# Altium PCB LedLampDriver_S.PcbDoc
Units mm, origin at the board's own origin, x right, y up, seen from the top; angles counter-clockwise.
Board outline 24 x 21.5 mm, 2 copper layers (Top Layer, Bottom Layer); 23 components, 11 nets, 63 pads, 229 vias.
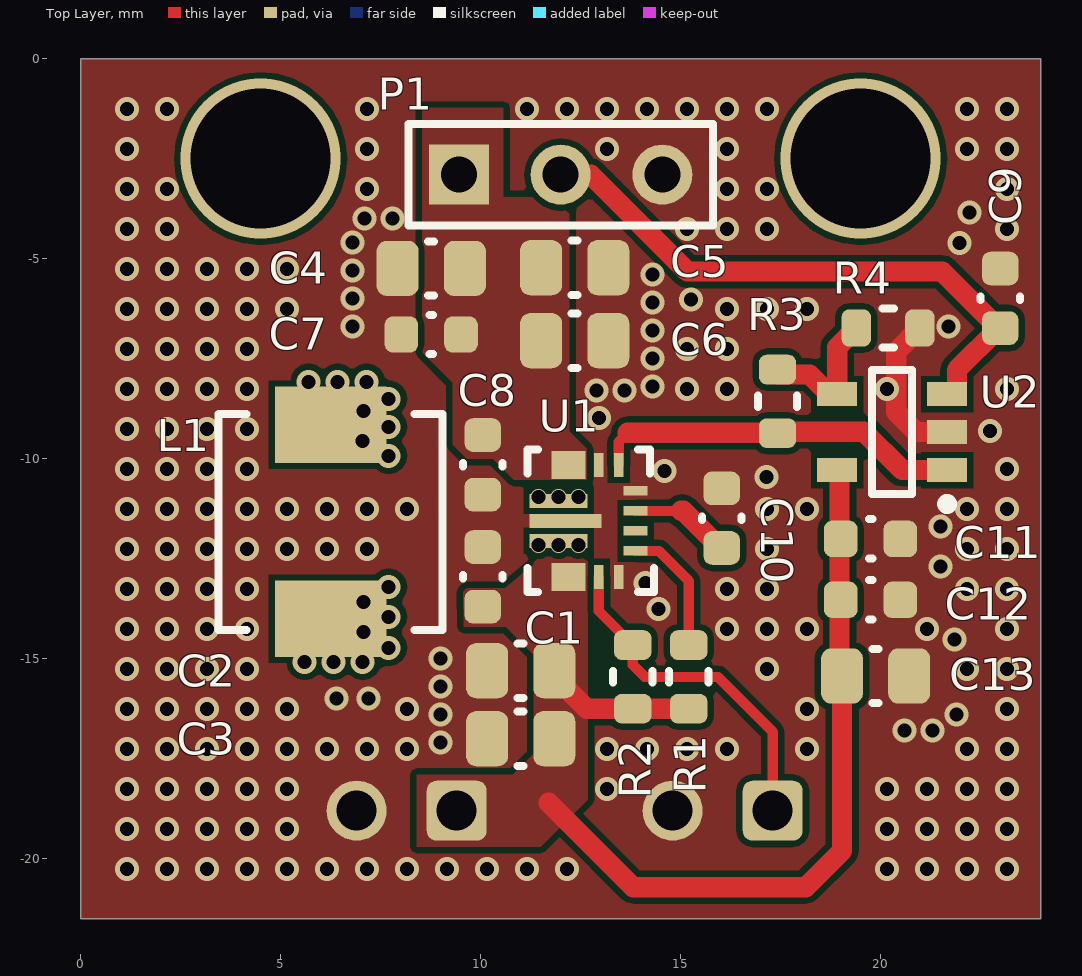
[diagram p0: Top Layer view]
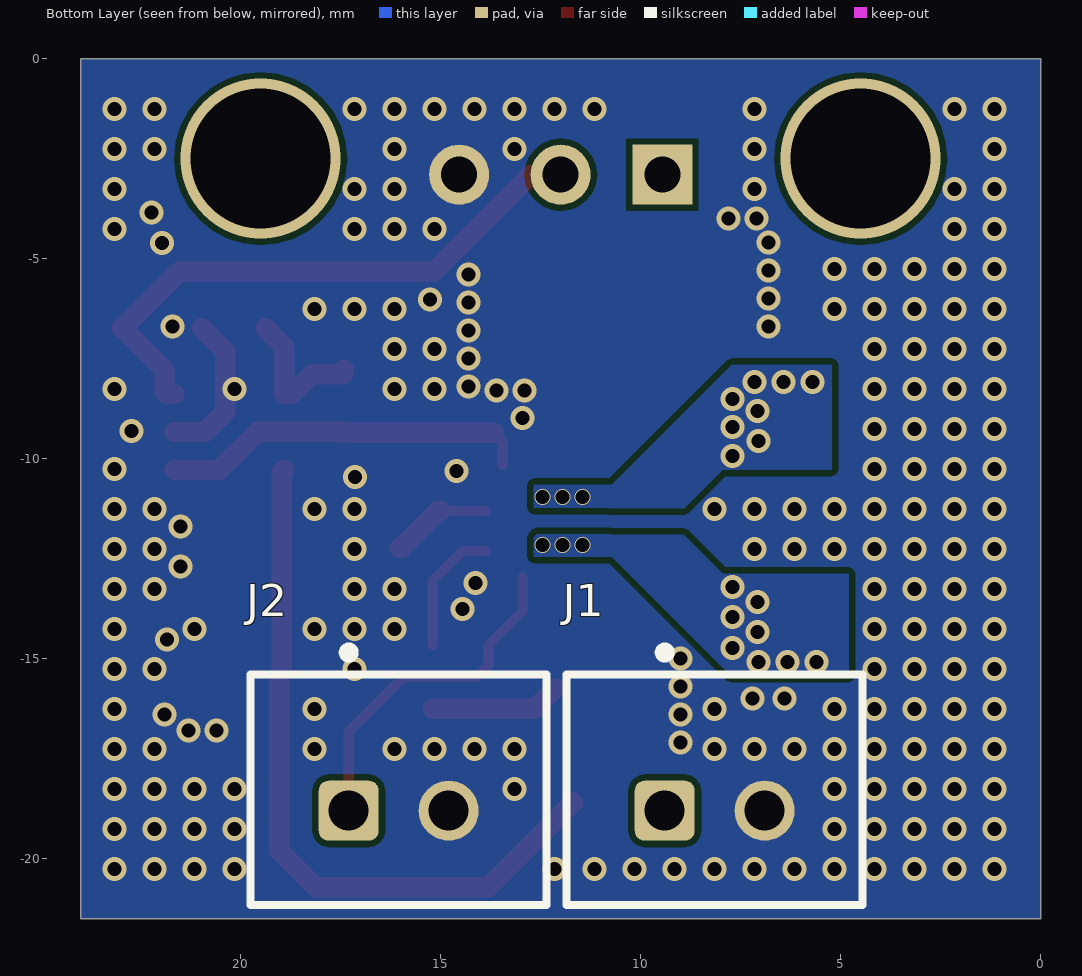
[diagram p1: Bottom Layer view, seen from below]
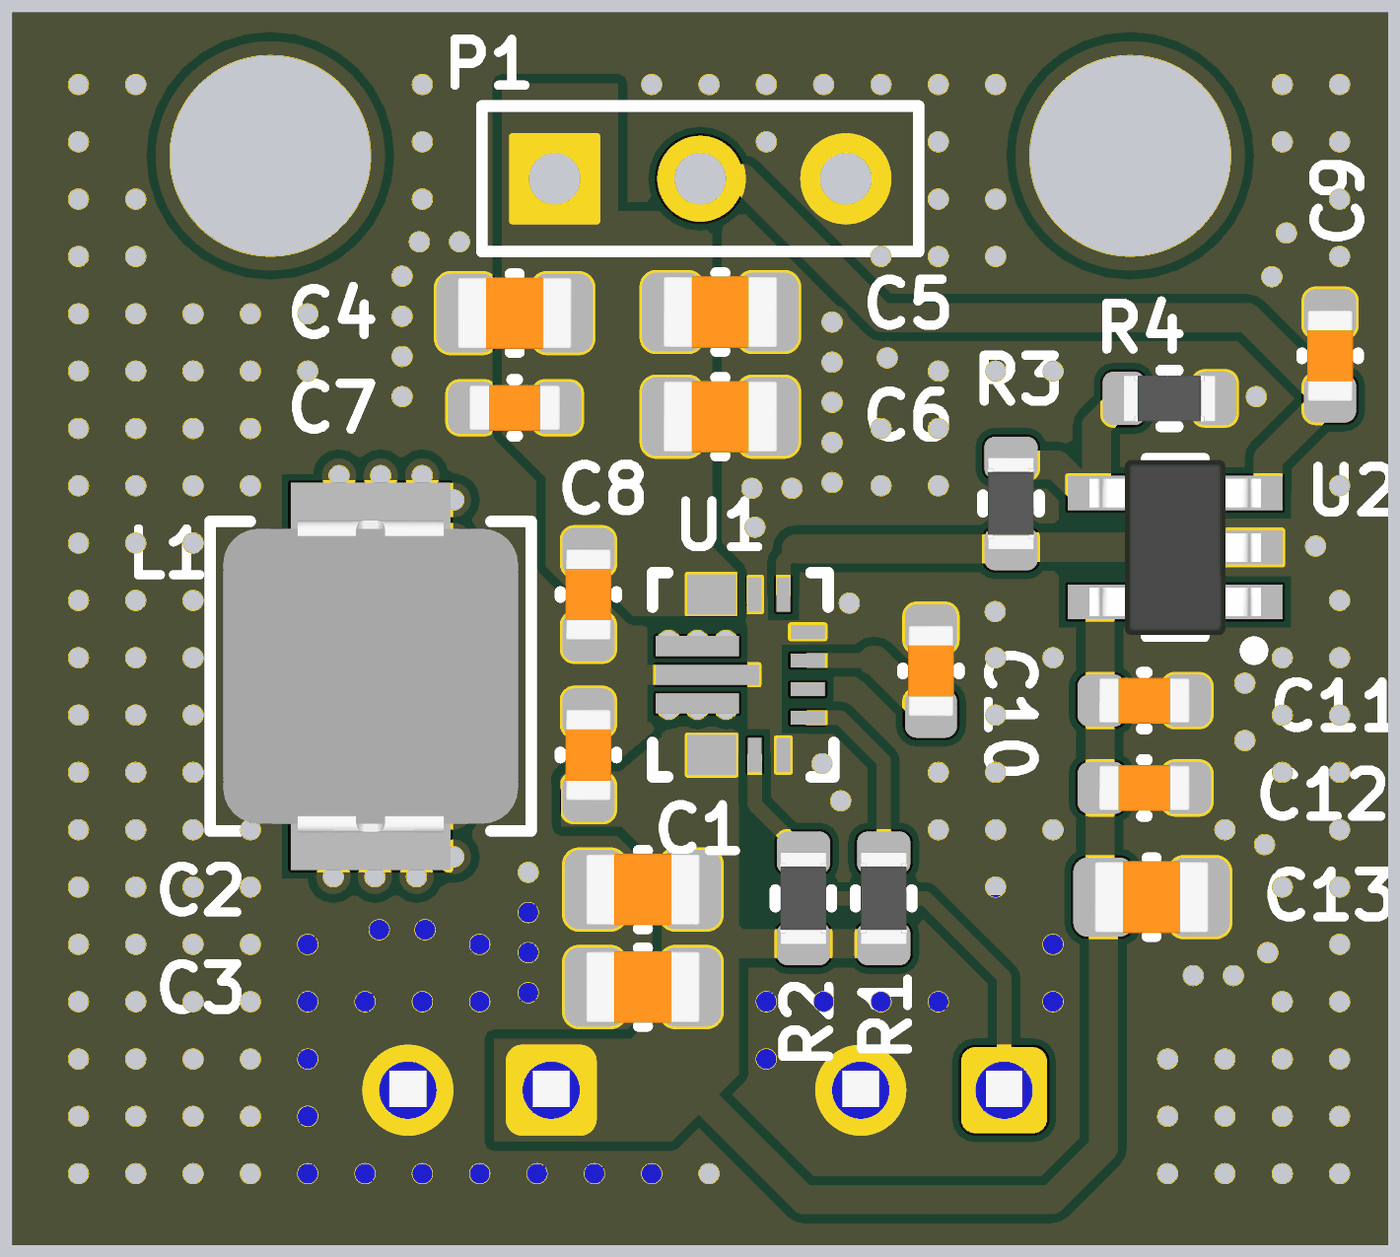
[diagram p2: 3D render of the assembled board from above, using the file's embedded part models]

## Layer stack, top to bottom
Top Solder: solder mask 0.0102, Solder Resist, Dk 3.5
Top Layer: signal copper 0.0356
Dielectric 1: dielectric 0.32, FR-4, Dk 4.8
Bottom Layer: signal copper 0.0356
Bottom Solder: solder mask 0.0102, Solder Resist, Dk 3.5

## Board outline
0,-21.5 0,0 24,0 24,-21.5

## Design rules (kind name [scope] priority, off if disabled: settings)
Clearance "Keepout 0" [All vs IsKeepOut] p1: gap=0.01 ignorepadtopadclearanceinfootprint=FALSE
Clearance [All] p2: gap=0.15 ignorepadtopadclearanceinfootprint=FALSE except(0: Arc-Hole Track-Hole SMDPad-Hole THPad-Hole Via-Hole Fill-Hole Poly-Hole Region-Hole Text-Hole)
HoleSize [All] p1: absolutevalues=TRUE maxlimit=6.3 minlimit=0.2 maxpercent=80.000 minpercent=20.000
MinimumAnnularRing [All] p1: minimumring=0.076
MinimumSolderMaskSliver [All] p1: minsoldermaskwidth=0.08
NetAntennae [All] p1: netantennaetolerance=1
PlaneConnect [All] p1: planeconnectstyle=Direct reliefexpansion=0.508 reliefentries=4 reliefconductorwidth=0.254 reliefairgap=0.254
PolygonConnect [All] p1: connectstyle=Direct reliefconductorwidth=0.254 reliefentries=4 polygonreliefangle="90 Angle" airgapwidth=0.254
RoomDefinition U_Sim_socket [InComponentClass('U_Sim_socket')] p1 off: confinementstyle=ConfineIn formatcopy=TRUE lockcomponents=FALSE outline -94.847,-76.256 -44.047,-76.256 -44.047,-50.856 -94.847,-50.856
RoomDefinition U_PSU3V5 [InComponentClass('U_PSU3V5')] p2 off: confinementstyle=ConfineIn formatcopy=TRUE lockcomponents=FALSE outline -94.847,-76.256 -44.047,-76.256 -44.047,-50.856 -94.847,-50.856
RoomDefinition U_PSU3V3 [InComponentClass('U_PSU3V3')] p3 off: confinementstyle=ConfineIn formatcopy=TRUE lockcomponents=FALSE outline -94.847,-76.256 -44.047,-76.256 -44.047,-50.856 -94.847,-50.856
RoomDefinition U_Power_connectors [InComponentClass('U_Power_connectors')] p4 off: confinementstyle=ConfineIn formatcopy=TRUE lockcomponents=FALSE outline -94.847,-76.256 -44.047,-76.256 -44.047,-50.856 -94.847,-50.856
RoomDefinition U_Motor [InComponentClass('U_Motor')] p5 off: confinementstyle=ConfineIn formatcopy=TRUE lockcomponents=FALSE outline -94.847,-76.256 -44.047,-76.256 -44.047,-50.856 -94.847,-50.856
RoomDefinition U_Limit_switches [InComponentClass('U_Limit_switches')] p6 off: confinementstyle=ConfineIn formatcopy=TRUE lockcomponents=FALSE outline -94.847,-76.256 -44.047,-76.256 -44.047,-50.856 -94.847,-50.856
RoomDefinition U_From_main_conn [InComponentClass('U_From_main_conn')] p7 off: confinementstyle=ConfineIn formatcopy=TRUE lockcomponents=FALSE outline -94.847,-76.256 -44.047,-76.256 -44.047,-50.856 -94.847,-50.856
RoomDefinition U_Flash [InComponentClass('U_Flash')] p8 off: confinementstyle=ConfineIn formatcopy=TRUE lockcomponents=FALSE outline -94.847,-76.256 -44.047,-76.256 -44.047,-50.856 -94.847,-50.856
RoomDefinition U_Ext_I2C [InComponentClass('U_Ext_I2C')] p9 off: confinementstyle=ConfineIn formatcopy=TRUE lockcomponents=FALSE outline -94.847,-76.256 -44.047,-76.256 -44.047,-50.856 -94.847,-50.856
RoomDefinition U_EEPROM [InComponentClass('U_EEPROM')] p10 off: confinementstyle=ConfineIn formatcopy=TRUE lockcomponents=FALSE outline -94.847,-76.256 -44.047,-76.256 -44.047,-50.856 -94.847,-50.856
RoomDefinition U_CPU [InComponentClass('U_CPU')] p11 off: confinementstyle=ConfineIn formatcopy=TRUE lockcomponents=FALSE outline -94.847,-76.256 -44.047,-76.256 -44.047,-50.856 -94.847,-50.856
RoomDefinition U_Buzzer [InComponentClass('U_Buzzer')] p12 off: confinementstyle=ConfineIn formatcopy=TRUE lockcomponents=FALSE outline -94.847,-76.256 -44.047,-76.256 -44.047,-50.856 -94.847,-50.856
RoomDefinition U_Battery_charger [InComponentClass('U_Battery_charger')] p13 off: confinementstyle=ConfineIn formatcopy=TRUE lockcomponents=FALSE outline -94.847,-76.256 -44.047,-76.256 -44.047,-50.856 -94.847,-50.856
RoomDefinition U_Accelerometer [InComponentClass('U_Accelerometer')] p14 off: confinementstyle=ConfineIn formatcopy=TRUE lockcomponents=FALSE outline -94.847,-76.256 -44.047,-76.256 -44.047,-50.856 -94.847,-50.856
RoutingVias [All] p1: holewidth=1 width=1.2 viastyle="Through Hole" minholewidth=0.35 minwidth=0.4 maxholewidth=0.5 maxwidth=0.6
SilkToSilkClearance [All] p1: silktosilkclearance=0.15
SilkToSolderMaskClearance [IsPad] p1: minsilkscreentomaskgap=0.15 clearancetoexposedcopper=TRUE
SolderMaskExpansion [All] p1: expansion=0.045
Width [All] p1: maxlimit=1.27 minlimit=0.254 preferedwidth=0.254 minimp=50.000000 maximp=50.000000 favimp=50.000000
24 further rules are at their usual default settings.

## Components (designator, comment, footprint, x,y, rotation, side; value= is the part's Value field where it differs from the comment)
C1 "10u" C0603_N 10.05,-12.953 r90 top
C2 "10u" C0805_N 11,-15.3 r180 top
C3 "100n" C0805_N 11,-17 r180 top
C4 "22u" C0805_N 8.763,-5.244 r180 top
C5 "22u" C0805_N 12.35,-5.225 r0 top
C6 "22u" C0805_N 12.35,-7.05 r0 top
C7 "1u" C0603_N 8.763,-6.895 r180 top
C8 "100n" C0603_N 10.05,-10.153 r270 top
C9 "100n" C0603_N 22.987,-5.989 r90 top
C10 "100n" C0603_N 16.024,-11.486 r90 top
C11 "100n" C0603_N 19.746,-12.003 r0 top
C12 "100n" C0603_N 19.746,-13.527 r0 top
C13 "1u" C0805_N 19.873,-15.432 r0 top
J1 "=Value" B2B-XH-A 9.4,-18.8 r180 bottom
J2 "=Value" B2B-XH-A 17.3,-18.8 r180 bottom
L1 "1.5u" IHLP2020 6.25,-11.578 r90 top
P1 "Header 3" HDR1X3 9.46,-2.9 r0 top
R1 "10k" R0603_N 15.2,-15.453 r90 top
R2 "10k" R0603_N 13.8,-15.453 r90 top
R3 "RES" R0603_N 17.421,-8.565 r90 top
R4 "RES" R0603_N 20.185,-6.732 r180 top
U1 "=Value" TPS63070 14.232,-13.334 r180 top
U2 "OP_AMP" SOT-23-5 20.285,-9.332 r180 top

## Footprints (in the part's own frame and the unit in brackets; to place one, negate y for a bottom-side part, rotate by r counter-clockwise, add the part's x,y. Pads: shape width x height; smd on the part's side, far side on the other; paste and mask are expansions set on the pad)
B2B-XH-A [mm] "Header, Vertical, 2.50 mm pitch; 0.70 mm lead width, 5 pins, 1 row, 5 pins per row, 14.90 mm L X 5.75 mm W X 7.00 mm H body"
  rrect33% 1.5x1.5 / inner round 1.5 / far side rrect33% 1.5x1.5 hole 1 paste-1.5: 1(0,0)
  round 1.5 hole 1 paste-1.5: 2(2.5,0)
  silkscreen extent -2.45,-2.35 4.95,4.08, body extent -2.45,-2.35 4.95,3.4, height 7.05
C0603_N [mm] "Capacitor, Chip; 1.60 mm L X 0.80 mm W X 0.87 mm H body"
  rrect50% 0.84x0.91 smd: 1(-0.745,0) 2(0.745,0)
  silkscreen extent -0.05,-0.49 0.05,0.49, body extent -0.8,-0.4 0.8,0.4, height 0.87
C0805_N [mm] "Capacitor, Chip; 2.00 mm L X 1.25 mm W X 1.35 mm H body"
  rrect48% 1.05x1.38 smd: 1(-0.84,0) 2(0.84,0)
  silkscreen extent -0.08,-0.68 0.08,0.68, body extent -1,-0.63 1,0.63, height 1.35
HDR1X3 [mm] "Connector; Header; 3 Position"
  rect 1.5x1.5 hole 0.9: 1(0,0)
  round 1.5 hole 0.9: 2(2.54,0) 3(5.08,0)
  silkscreen extent -1.27,-1.27 6.35,1.27
IHLP2020 [mm] "Inductor, 5.18mm L X 5.18mm W X 3 mm H body"
  rect 1.905x2.79 smd: 1(-2.425,0) 2(2.425,0)
  silkscreen extent -2.7,-2.8 2.7,2.8, body extent -2.73,-2.57 2.73,2.57, height 2.84
R0603_N [mm] "Resistor, Chip; 1.60 mm L X 0.80 mm W X 0.55 mm H body"
  rrect51% 0.74x0.93 smd: 1(-0.795,0) 2(0.795,0)
  silkscreen extent -0.15,-0.49 0.15,0.49, body extent -0.8,-0.4 0.8,0.4, height 0.55
SOT-23-5 [mm] "SOT23, 5-Leads, Body 2,90x2,80mm, Pitch 0,95mm, IPC Medium Density"
  rect 1x0.6 smd: 1(-1.375,0.95) 2(-1.375,0) 3(-1.375,-0.95) 4(1.375,-0.95) 5(1.375,0.95)
  silkscreen extent -1.5,-1.55 0.5,1.92, body extent -1.5,-1.53 1.5,1.53, height 1.45
TPS63070 [mm]
  rect 0.6x0.24 smd: 1(0.357,-1.031) 2(0.357,-1.531) 3(0.357,-2.031) 4(0.357,-2.531)
  rect 0.24x0.6 smd: 5(0.782,-3.181) 6(1.282,-3.181) 14(1.282,-0.381) 15(0.782,-0.381)
  rect 0.85x0.7 smd: 7(2.032,-3.181) 8(2.032,-3.181) 12(2.032,-0.381) 13(2.032,-0.381)
  rect 1.45x0.35 smd: 9(2.282,-2.281) 11(2.282,-1.281)
  rect 1.8x0.35 smd: 10(2.107,-1.781)
  silkscreen extent -0.1,-3.56 3.06,0

## Part data
C1 C2 C3 C4 C5 C6 C7 C8 C9 C10 C11 C12 C13: library part CAP, RevS="$Rev:: 58        $"
J1 J2: library part PINHDR_2X1, "Socket", ComponentLink1Description=Manufacturer, ComponentLink1URL=http://www.we-online.de, ComponentLink2Description=Datasheet, ComponentLink2URL=http://katalog.we-online.de/em/datasheet/691412320002.pdf
L1: library part IND, "Inductor"
P1: "Header, 3-Pin", LatestRevisionDate=17-Jul-2002, LatestRevisionNote="Re-released for DXP Platform.", Publisher="Altium Limited"
R1 R2: library part RES
U1: library part TPS63070, "2-V to 16-V Buck-Boost Converter With 3.6-A Switch Current"

## Via types
v1: diameter 0.6, hole 0.35, Top Layer to Bottom Layer, tented both sides, 221 vias
v2: diameter 0.4, hole 0.35, Top Layer to Bottom Layer, tented both sides, 6 vias
v3: diameter 4, hole 3.5, Top Layer to Bottom Layer, tented both sides, 2 vias

## Nets (pads, with @x,y where several pads share a name; then routed paths per layer and width w, separated by ;. In a path a pad name is that pad's centre, name@x,y a point inside that pad or via, vN(x,y) a via of type N, cw(c..) or ccw(c..) an arc to the next point about the centre after c; other vN are vias at no path point)
EN: J2.1 R2.2 U1.14 | length 8.7
  Top Layer w0.254: U1.14 12.95,-13.808 R2.2 13.8,-15.153 14.1,-15.453 15.925,-15.453 17.3,-16.828 J2.1
FB: C9.1 P1.2 U2.3 | length 15.1
  Top Layer w0.508: P1.2@12.19,-3.09 P1.2 12.749,-2.9 15.17,-5.321 21.539,-5.321 C9.1@22.952,-6.734 ; U2.3 21.86,-8.382 21.906,-8.336 21.906,-7.78 C9.1@22.952,-6.734 ; C9.1 C9.1@22.952,-6.734
GND: C1.2 C2.2 C3.2 C4.2 C5.2 C6.2 C7.2 C8.2 C9.2 C10.2 C11.2 C12.2 C13.2 J1.2 J2.2 P1.3 R4.1 U1.4 U1.6 U1.10 U1.15 U2.2 | length 3.8
  Top Layer w0.508: R4.1 20.385,-7.327 20.385,-8.832 20.885,-9.332 U2.2
  other v1: 1.153,-20.256 2.153,-20.256 3.153,-20.256 4.153,-20.256 5.153,-20.256 6.153,-20.256 7.153,-20.256 8.153,-20.256 9.153,-20.256 10.153,-20.256 11.153,-20.256 12.153,-20.256 20.153,-20.256 21.153,-20.256 22.153,-20.256 23.153,-20.256 1.153,-19.256 2.153,-19.256 3.153,-19.256 4.153,-19.256 5.153,-19.256 20.153,-19.256 21.153,-19.256 22.153,-19.256 23.153,-19.256 1.153,-18.256 2.153,-18.256 3.153,-18.256 4.153,-18.256 5.153,-18.256 13.153,-18.256 20.153,-18.256 21.153,-18.256 22.153,-18.256 23.153,-18.256 1.153,-17.256 2.153,-17.256 3.153,-17.256 4.153,-17.256 5.153,-17.256 6.153,-17.256 7.153,-17.256 8.153,-17.256 13.153,-17.256 14.153,-17.256 15.153,-17.256 16.153,-17.256 18.153,-17.256 22.153,-17.256 23.153,-17.256 9,-17.1 20.6,-16.8 21.3,-16.8 9,-16.4 21.9,-16.4 1.153,-16.256 2.153,-16.256 3.153,-16.256 4.153,-16.256 5.153,-16.256 8.153,-16.256 18.153,-16.256 23.153,-16.256 6.4,-16 7.2,-16 9,-15.7 1.153,-15.256 2.153,-15.256 3.153,-15.256 4.153,-15.256 17.153,-15.256 22.153,-15.256 23.153,-15.256 9,-15 21.844,-14.515 1.153,-14.256 2.153,-14.256 3.153,-14.256 4.153,-14.256 16.153,-14.256 17.153,-14.256 18.153,-14.256 21.153,-14.256 23.153,-14.256 14.45,-13.753 1.153,-13.256 2.153,-13.256 3.153,-13.256 4.153,-13.256 16.153,-13.256 17.153,-13.256 22.153,-13.256 23.153,-13.256 14.125,-13.103 21.5,-12.7 1.153,-12.256 2.153,-12.256 3.153,-12.256 4.153,-12.256 5.153,-12.256 6.153,-12.256 7.153,-12.256 17.153,-12.256 22.153,-12.256 23.153,-12.256 21.5,-11.7 1.153,-11.256 2.153,-11.256 3.153,-11.256 4.153,-11.256 5.153,-11.256 6.153,-11.256 7.153,-11.256 8.153,-11.256 17.153,-11.256 18.153,-11.256 22.153,-11.256 23.153,-11.256 17.145,-10.451 14.6,-10.303 1.153,-10.256 2.153,-10.256 3.153,-10.256 4.153,-10.256 23.153,-10.256 22.733,-9.308 1.153,-9.256 2.153,-9.256 3.153,-9.256 4.153,-9.256 12.954,-8.979 12.9,-8.3 13.6,-8.3 1.153,-8.256 2.153,-8.256 3.153,-8.256 4.153,-8.256 15.153,-8.256 16.153,-8.256 20.153,-8.256 23.153,-8.256 14.3,-8.2 14.3,-7.5 1.153,-7.256 2.153,-7.256 3.153,-7.256 4.153,-7.256 15.153,-7.256 16.153,-7.256 14.3,-6.8 6.8,-6.7 21.7,-6.7 1.153,-6.256 2.153,-6.256 3.153,-6.256 4.153,-6.256 5.153,-6.256 16.153,-6.256 17.153,-6.256 18.153,-6.256 14.3,-6.1 15.262,-6.025 6.8,-6 14.3,-5.4 6.8,-5.3 1.153,-5.256 2.153,-5.256 3.153,-5.256 4.153,-5.256 5.153,-5.256 6.8,-4.6 21.971,-4.609 1.153,-4.256 2.153,-4.256 15.153,-4.256 16.153,-4.256 17.153,-4.256 23.153,-4.256 7.1,-4 7.8,-4 22.225,-3.847 1.153,-3.256 2.153,-3.256 7.153,-3.256 16.153,-3.256 17.153,-3.256 23.153,-3.256 1.153,-2.256 7.153,-2.256 13.153,-2.256 16.153,-2.256 22.153,-2.256 23.153,-2.256 1.153,-1.256 2.153,-1.256 7.153,-1.256 11.153,-1.256 12.153,-1.256 13.153,-1.256 14.153,-1.256 15.153,-1.256 16.153,-1.256 17.153,-1.256 22.153,-1.256 23.153,-1.256
NetC10_1: C10.1 U1.3 | length 2.5
  Top Layer w0.254: U1.3 15.008,-11.303
  Top Layer w0.508: 15.008,-11.303 15.061,-11.303 15.989,-12.231 C10.1
NetL1_1: L1.1 U1.11
  other v1: 5.6,-15.078 6.325,-15.078 7.05,-15.078 7.7,-14.728 7.075,-14.328 7.7,-13.953 7.075,-13.578 7.7,-13.203
  other v2: 11.45,-12.153 11.95,-12.153 12.45,-12.153
NetL1_2: L1.2 U1.9
  other v1: 7.7,-9.928 7.05,-9.553 7.7,-9.203 7.075,-8.803 7.7,-8.503 5.7,-8.078 6.425,-8.078 7.15,-8.078
  other v2: 11.45,-10.953 11.95,-10.953 12.45,-10.953
NetR1_2: R1.2 U1.1 | length 3.2
  Top Layer w0.254: U1.1 14.45,-12.303 15.2,-13.053 R1.2
NetR3_1: R3.1 U1.5 U2.1 | length 9.4
  Top Layer w0.254: U1.5 13.45,-9.578 13.675,-9.353
  Top Layer w0.508: 13.675,-9.353 17.414,-9.353 R3.1 R3.1@17.454,-9.327 ; R3.1@17.375,-9.327 R3.1@17.454,-9.327 ; R3.1@17.463,-9.318 R3.1@17.454,-9.327 ; U2.1 20.535,-10.282 19.58,-9.327 R3.1@17.454,-9.327
NetR3_2: R3.2 R4.2 U2.4 | length 3.7
  Top Layer w0.508: R3.2 R3.2@17.537,-7.886 ; R3.2@17.449,-7.895 18.223,-7.895 18.71,-8.382 U2.4 18.91,-7.212 R4.2
Vin: C1.1 C2.1 C3.1 C11.1 C12.1 C13.1 J1.1 R1.1 R2.1 U1.12 U1.13 U2.5 | length 21.4
  Top Layer w0.508: 11.7,-18.6 13.811,-20.711 18.127,-20.711 19.033,-19.805 C13.1 18.971,-15.371 18.971,-10.328 18.925,-10.282 U2.5 ; C2.1@12.15,-15.753 12.645,-16.248 R2.1 R1.1
Vout: C4.1 C5.1 C6.1 C7.1 C8.1 P1.1 U1.7 U1.8
pads on no net: U1.2
copper on no net:
  other v3: 4.5,-2.5 19.5,-2.5

## Polygon pours and split planes (outlines as drawn)
GND on Bottom Layer "Top Layer-No Net1" (solid, pour order 10): 0,-21.5 0,0 24,0 24,-21.5
NetL1_2 on Bottom Layer "Bottom Layer-NetL1_2" (solid, pour order 6): 12.675,-11.228 12.675,-10.653 10.725,-10.653 7.725,-7.653 5.225,-7.653 5.225,-10.278 7.95,-10.278 8.925,-11.253
NetL1_1 on Bottom Layer "Bottom Layer-NetL1_1" (solid, pour order 4): 12.675,-11.878 12.675,-12.453 10.725,-12.453 7.75,-15.428 4.8,-15.428 4.8,-12.878 7.95,-12.878 8.925,-11.903
GND on Top Layer "Top Layer-No Net" (solid, pour order 8): 0,-21.5 0,0 24,0 24,-21.5
Vout on Top Layer "Top Layer-Vout" (solid, pour order 2): 12.65,-10.528 10.825,-10.528 10.3,-10.003 9.65,-10.003 9.3,-9.653 9.3,-8.103 8.535,-7.338 8.535,-1.232 10.569,-1.232 10.569,-3.466 12.214,-3.466 12.214,-9.317 12.65,-9.753
Vin on Top Layer "Top Layer-Vin" (solid, pour order 0): 8.4,-19.7 11.5,-19.7 12.675,-18.525 12.675,-12.453 11.325,-12.453 11.325,-12.633 10.605,-13.241 9.562,-13.241 9.575,-14.203 10.625,-14.203 11.325,-14.903 11.325,-17.375 10.8,-17.9 8.4,-17.9

## Silkscreen, mask and mechanical layers (free items; w line width, h text height)
Mechanical 1:
  the board outline again, w0.2

## Text inside footprints (layer, text, board x,y; h text height)
U1: Mechanical 19 "Designator" at 13.982,-11.509 h0.4 r180